# Allegro board PROIECT 1.brd
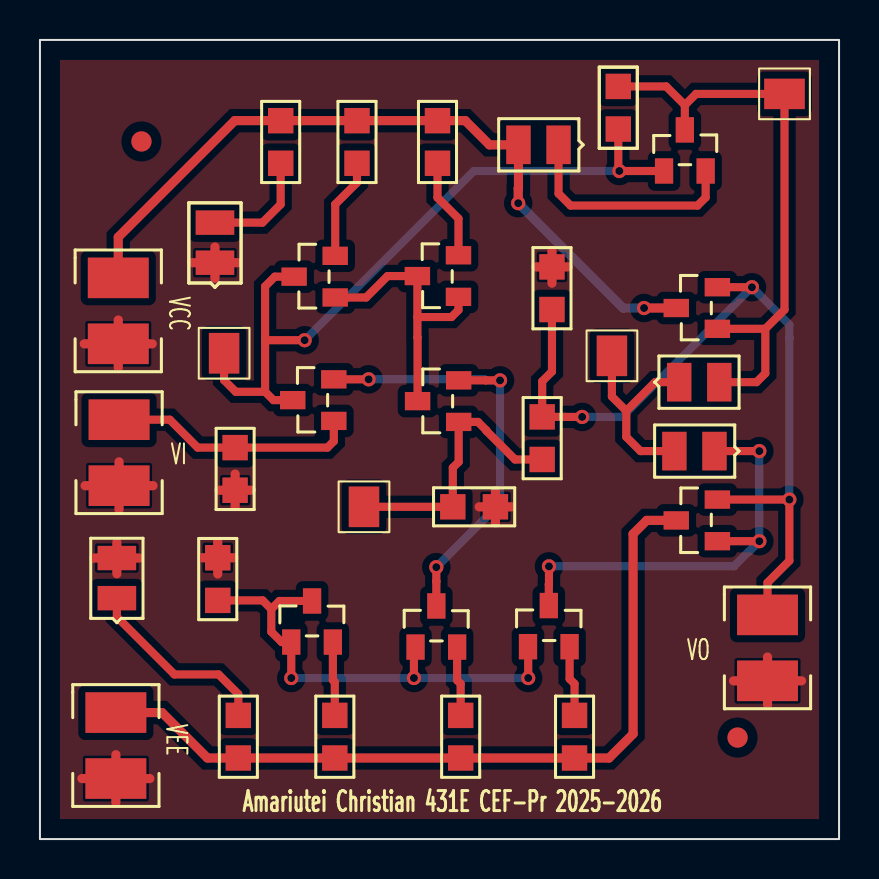
[diagram p0: board, top side]
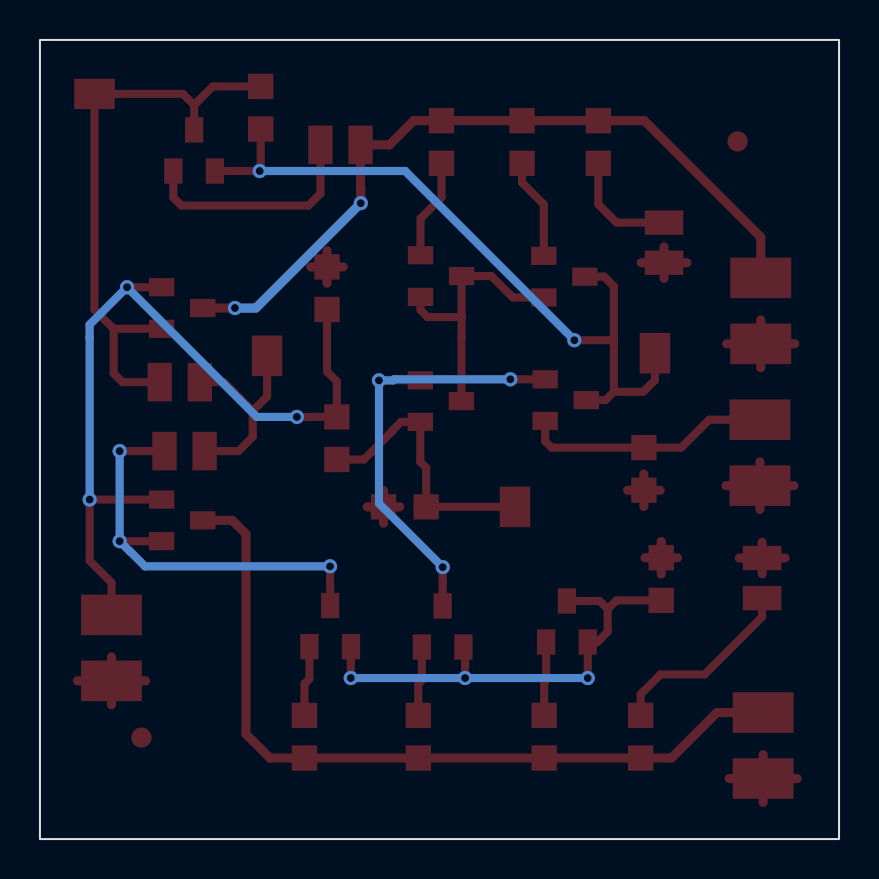
[diagram p1: board, bottom side, seen from below]

Outline 40 x 40 mm; copper layers: TOP, BOTTOM. Coordinates in mm from the lower left corner of the outline.
Outline path: rectangle 0,0 40,40

## Design rules (mm)
nets with their own width: min track width 0.406; nets D1- D2+ D2- D3- N00103 N00224 N00228 N00232 N00365 N02783 N02787 N02983 N02987 N03094 N05874 N42898 VI VO
nets with their own width: min track width 0.457; nets D1+ GND VEE

## Placement (name value [footprint] x y rotation side)
C1  47p  [SMC0805]  28.95 35.54 90 top
D4  5V,LED,LED  [SMD0805]  8.76 28.85 90 top
D5  5V,LED,LED  [SMD0805]  3.85 12.06 90 top
J1  CON2  [1210RF_WV_12D]  3.96 19.34 90 top
J2  CON2  [1210RF_WV_12D]  3.92 26.44 90 top
J3  CON2  [1210RF_WV_12D]  3.8 4.68 90 top
J4  CON2  [1210RF_WV_12D]  36.42 9.57 90 top
J5  CON1  [JUMPER1]  16.22 16.63 0 top
J6  CON1  [JUMPER1]  9.22 24.32 0 top
J7  CON1  [JUMPER1]  37.27 37.3 270 top
J8  CON1  [JUMPER1]  28.63 24.19 0 top
NOREF  -  [unnamed]  34.92 5.08 0 top
NOREF#2  -  [unnamed]  5.08 34.92 0 top
Q1  QBC846B  [TO236AA]  12.58 9.86 270 top
Q2  QBC846B  [TO236AA]  18.8 9.61 270 top
Q3  QBC846B  [TO236AA]  24.43 9.63 270 top
Q4  QBC846B  [TO236AA]  14.71 20.93 0 top
Q5  QBC846B  [TO236AA]  20.96 20.88 0 top
Q6  QBC856B  [TO236AA]  14.78 27.11 0 top
Q7  QBC856B  [TO236AA]  20.95 27.14 0 top
Q8  QBC846B  [TO236AA]  33.91 25.54 0 top
Q9  QBC856B  [TO236AA]  33.91 14.91 0 top
Q10  QBC856B  [TO236AA]  31.24 33.44 270 top
R1  3.9k  [SMR0805]  14.76 6.19 270 top
R2  8.2k  [SMR0805]  21.06 6.19 270 top
R3  2.2k  [SMR0805]  26.76 6.19 270 top
R5  1k  [SMR0805]  15.87 33.83 90 top
R6  1k  [SMR0805]  19.9 33.83 90 top
R7  9.1k  [SMR0805]  25.14 19 90 top
R8  1k  [SMR0805]  22.8 16.63 180 top
R9  470  [SMR0805]  9.93 4.06 90 top
R10  470  [SMR0805]  12.05 35.96 270 top
R11  2.7k  [SMR0805]  8.9 14.08 270 top
RI  180k  [SMR0805]  9.77 17.46 90 top
RL  10  [SMR0805]  25.63 28.64 270 top
U1  1N4148  [SMD0805]  25.96 34.75 180 top
U2  1N4148  [SMD0805]  32 22.87 0 top
U3  1N4148  [SMD0805]  33.76 19.42 180 top

## Library data of the parts
C1 = C
D4 D5 = LED_7
J1-J4 = CON2
J5-J8 = CON1: User Part Number: ***
Q1-Q5 Q8 = QBC846B_0
Q6 Q7 Q9 Q10 = QBC856B_0
R1-R3 R5-R11 RI RL = R_0
U1-U3 = 1N4148_5

## Footprints (pads in the part's own frame, mm; a bottom-side part is the same pattern mirrored in y, then rotated)
1210RF_WV_12D
  rect 2.032x3.048 smd: 1(-1.651,0) 2(1.651,0)
JUMPER1
  rect 1.524x2.032 smd: 1(0,0)
SMC0805
  rect 1.27x1.27 smd: 1(0,0) 2(2.134,0)
SMD0805
  rect 1.219x1.93 smd: A(2.007,0) C(0,0)
SMR0805
  rect 1.27x1.27 smd: 1(0,0) 2(2.134,0)
TO236AA
  rect 1.27x0.914 smd: 1(0,0) 2(0,2.083) 3(-2.057,1.041)
unnamed
  round 1.016 smd: (0,0)

## Nets
GND: D4.C D5.A(2) J1.1 J2.1 J3.1 J4.1 R8.1 R11.1 RI.1 RL.1
VEE: J3.2 Q9.3 R1.2 R2.2 R3.2 R9.1
D1+: J2.2 Q8.3 R5.2 R6.2 R10.1 U1.A(2)
D1-: Q10.2(E) U1.C
D2+: C1.2 J7.1 Q8.1 Q10.3 U2.A(2)
D2-: J8.1 U2.C U3.A(2)
D3-: Q3.3 Q9.1 U3.C
VI: J1.2 Q4.1 RI.2
VO: J4.2 Q8.2(E) Q9.2(E) R7.2 RL.2
N00103: Q1.1 Q1.3 Q2.1 Q3.1 R11.2
N00224: Q1.2(E) R1.1
N00228: Q2.2(E) R2.1
N00232: Q3.2(E) R3.1
N00365: Q2.3 Q4.2(E) Q5.2(E)
N02783: C1.1 J6.1 Q4.3 Q6.3 Q10.1
N02787: Q5.3 Q6.1 Q7.1 Q7.3
N02983: Q6.2(E) R5.1
N02987: Q7.2(E) R6.1
N03094: J5.1 Q5.1 R7.1 R8.2
N05874: D4.A(2) R10.2
N42898: D5.C R9.2

## Via types
v1: diameter 0.711, hole 0.4, TOP to BOTTOM, 16 vias

## Routing (per net, layer and track width the routed paths; a pad name or vN(x,y) marks a point on that pad's centre or on a via; arc(x,y) is an arc through that point)
GND: length 43.9
  TOP w0.457: 34.72,7.92 J4.1 ; J4.1 36.42,6.73 ; J4.1 36.42,9.11 ; J4.1 38.12,7.92 ; 2.26,17.69 J1.1 ; J1.1 3.96,18.88 ; J1.1 5.66,17.69 ; J1.1 3.96,16.5 ; RI.1 10.58,17.46 ; RI.1 9.77,16.65 ; RI.1 8.96,17.46 ; RI.1 9.77,18.27 ; 3.8,1.84 J3.1 ; J3.1 2.1,3.03 ; J3.1 3.8,4.22 ; J3.1 5.5,3.03 ; R8.1 23.61,16.63 ; R8.1 22.8,17.44 ; R8.1 21.99,16.63 ; R8.1 22.8,15.82 ; 7.62,28.85 D4.C ; D4.C 8.76,29.64 ; D4.C 8.76,28.06 ; D4.C 9.9,28.85 ; D5.A 3.85,14.85 ; D5.A 2.71,14.07 ; D5.A 3.85,13.28 ; D5.A 4.99,14.07 ; J2.1 3.92,25.98 ; J2.1 3.92,23.6 ; J2.1 5.62,24.79 ; J2.1 2.22,24.79 ; 8.9,13.27 R11.1 ; R11.1 8.09,14.08 ; R11.1 9.71,14.08 ; R11.1 8.9,14.89 ; 25.63,27.83 RL.1 ; RL.1 24.82,28.64 ; RL.1 26.44,28.64 ; RL.1 25.63,29.45
VEE: length 39.8
  TOP w0.457: Q9.3 30.37,15.95 29.69,15.27 29.69,5.26 28.49,4.06 R3.2 R2.2 R1.2 R9.1 8.38,4.06 6.11,6.33 J3.2
D1+: length 38
  TOP w0.457: v1(23.94,31.83) 23.94,32.57 23.95,32.58 U1.A 22.5,34.75 21.29,35.96 R6.2 R5.2 R10.1 9.75,35.96 3.92,30.13 J2.2 ; v1(30.24,26.58) Q8.3
  BOTTOM w0.457: v1(30.24,26.58) 29.19,26.58 v1(23.94,31.83)
D1-: length 11.5
  TOP w0.406: Q10.2 33.32,32.12 32.92,31.71 26.56,31.71 25.96,32.31 U1.C
D2+: length 29.5
  TOP w0.406: U2.A 35.87,22.87 36.31,23.31 36.31,25.54 ; 36.31,25.54 Q8.1 ; 36.31,25.54 37.27,26.5 J7.1 32.84,37.3 32.28,36.74 ; C1.2 31.35,37.67 32.28,36.74 ; 32.28,36.74 Q10.3
D2-: length 10.3
  TOP w0.406: U3.A 30.06,19.42 29.35,20.13 29.35,21.43 ; J8.1 28.63,22.84 28.63,22.84 28.63,22.15 29.35,21.43 ; 29.35,21.43 30.79,22.87 U2.C
D3-: length 21.9
  TOP w0.406: v1(25.48,13.65) 25.48,12.76 25.47,12.75 Q3.3 ; v1(36.01,14.91) Q9.1 ; U3.C v1(36.01,19.42)
  BOTTOM w0.406: v1(36.01,19.42) v1(36.01,14.91) 35.51,14.41 35.5,14.41 34.74,13.65 v1(25.48,13.65)
VI: length 12.5
  TOP w0.406: J1.2 6.5,20.99 7.9,19.59 RI.2 14.39,19.59 14.71,19.91 Q4.1
VO: length 41.7
  TOP w0.406: v1(35.64,27.62) Q8.2 ; RL.2 25.63,23.4 25.14,22.91 R7.2 26.27,21.13 26.27,21.13 v1(27.14,21.13) ; J4.2 36.42,12.84 37.51,13.93 v1(37.51,16.99) Q9.2
  BOTTOM w0.406: v1(27.14,21.13) 29.15,21.13 v1(35.64,27.62) 37.52,25.75 37.52,25.08 37.51,25.07 v1(37.51,16.99)
N00103: length 24.2
  TOP w0.406: v1(12.58,8.06) Q1.1 12.1,9.86 11.58,10.38 11.58,11.51 ; 11.58,11.51 11.14,11.95 R11.2 ; 11.58,11.51 11.99,11.92 Q1.3 ; v1(18.72,8.06) 18.72,9.53 Q2.1 ; v1(24.44,8.06) 24.44,9.62 Q3.1
  BOTTOM w0.406: v1(24.44,8.06) v1(18.72,8.06) v1(12.58,8.06)
N00224: length 3.7
  TOP w0.406: Q1.2 14.66,7.96 14.76,7.86 R1.1
N00228: length 3.5
  TOP w0.406: Q2.2 20.88,7.95 21.06,7.77 R2.1
N00232: length 3.5
  TOP w0.406: Q3.2 26.51,8.02 26.76,7.77 R3.1
N00365: length 23
  TOP w0.406: Q2.3 19.84,12.9 19.84,12.9 v1(19.84,13.61) ; Q5.2 22.32,22.96 22.32,22.96 v1(23.03,22.96) ; Q4.2 v1(16.45,23.01)
  BOTTOM w0.406: v1(19.84,13.61) 23.03,16.8 v1(23.03,22.96) 22.32,22.96 22.27,23.01 v1(16.45,23.01)
N02783: length 37.7
  TOP w0.406: J6.1 9.22,22.97 9.8,22.39 11.27,22.39 ; 11.27,24.97 11.27,27.66 11.76,28.15 Q6.3 ; 11.27,24.97 v1(13.25,24.97) ; 11.27,24.97 11.27,22.39 ; 11.27,22.39 11.69,21.97 Q4.3 ; Q10.1 v1(29,33.44) 28.96,33.48 28.96,33.51 28.95,33.52 C1.1
  BOTTOM w0.406: v1(29,33.44) 21.72,33.44 v1(13.25,24.97)
N02787: length 13.7
  TOP w0.406: 18.89,26.13 20.6,26.13 20.95,26.48 Q7.1 ; 18.89,26.13 Q7.3 17.4,28.18 16.33,27.11 Q6.1 ; 18.89,26.13 18.89,25.12 18.9,25.11 Q5.3
N02983: length 5.1
  TOP w0.406: R5.1 15.87,32.86 14.78,31.77 Q6.2
N02987: length 5
  TOP w0.406: R6.1 19.9,32.11 20.95,31.06 Q7.2
N03094: length 13.8
  TOP w0.406: R7.1 23.78,19 22.35,20.43 22.35,20.46 21.93,20.88 Q5.1 20.96,18.88 20.67,18.59 R8.2 J5.1
N05874: length 5.7
  TOP w0.406: R10.2 12.05,31.77 11.14,30.86 D4.A
N42898: length 9.7
  TOP w0.406: R9.2 9.93,7.25 8.94,8.24 6.73,8.24 3.85,11.12 D5.C

## Copper pours and planes (outline as drawn; the poured copper is in the pictures)
GND on TOP: 1,1 1,39 39,39 39,1

## Text on the board
Ref Des/Silkscreen Top: VI | VO | VEE | VCC | Amariutei Christian 431E CEF-Pr 2025-2026
XSECTION_CHART: *  SURFACE - 0 MM | L1 TOP CONDUCTOR - 0.018001 MM | *  DIELECTRIC - 1.564 MM | L2 BOTTOM CONDUCTOR - 0.018001 MM | DESIGN CROSS SECTION CHART | ___________________________ | TOTAL THICKNESS 1.599999 MM | 1-2
DEVICE_TYPE_TOP: FIGURE | FINISHED_SIZE | 15.748 | DRILL CHART: TOP to BOTTOM | ALL UNITS ARE IN MILS | PLATED | QTY | 16
